# Altium PCB powerboard_4layer.PcbDoc (part 1 of 2)
Units mil, origin at the board's own origin, x right, y up, seen from the top; angles counter-clockwise.
Board outline 3779.53 x 2125.98 mil, 4 copper layers (Top Layer, Mid-Layer 1, Mid-Layer 2, Bottom Layer); 154 components, 94 nets, 450 pads, 392 vias.
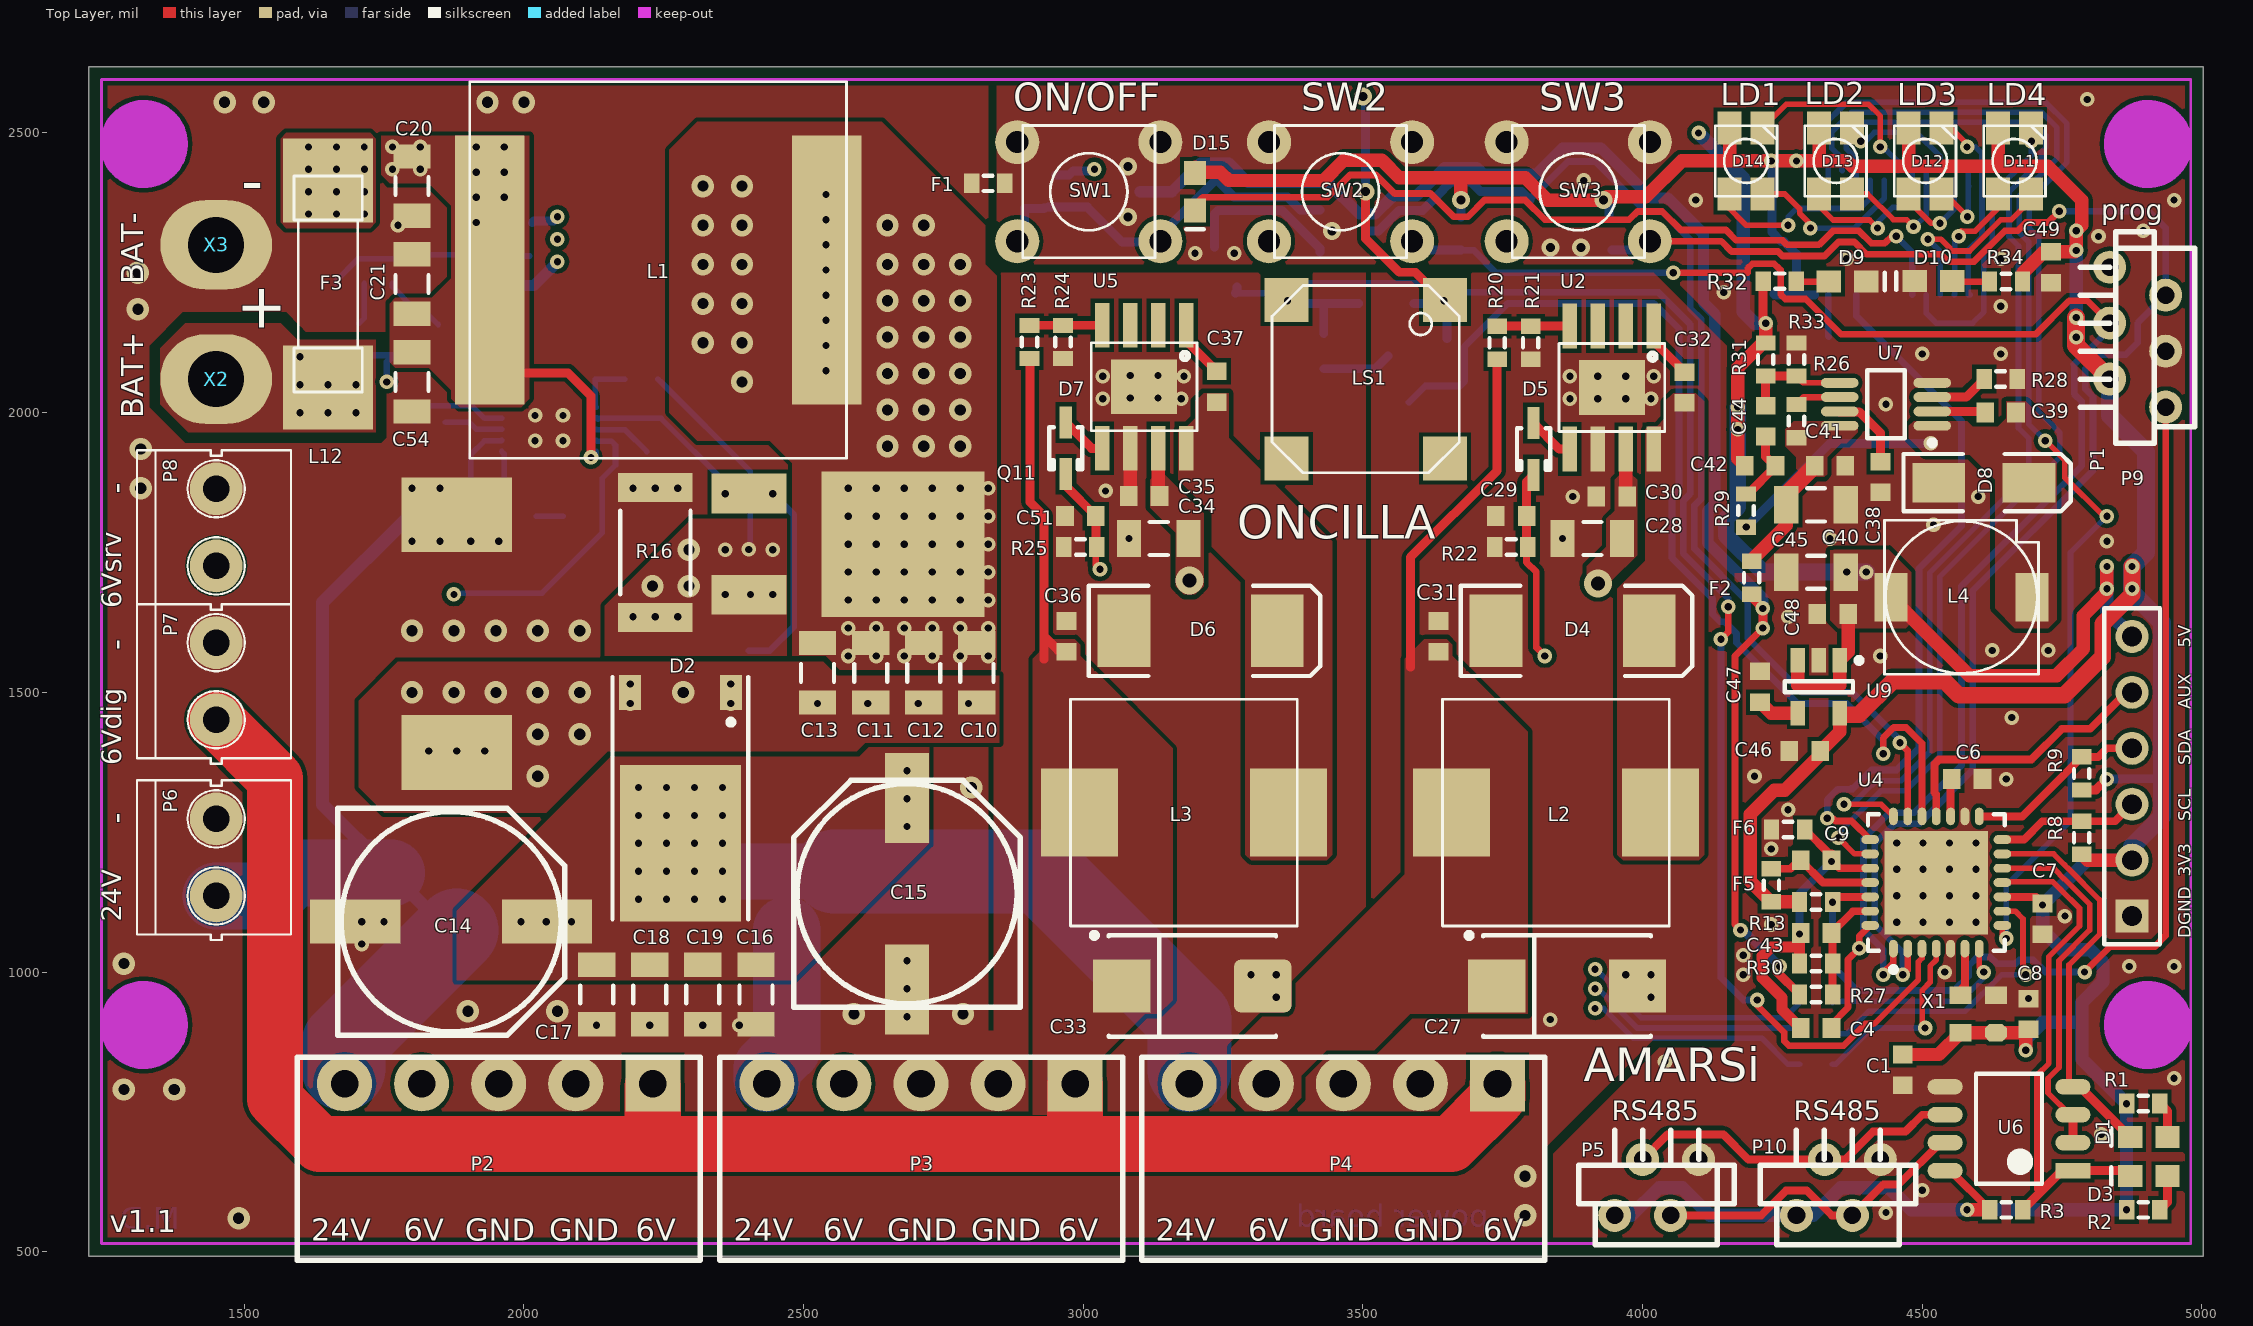
[diagram p0: Top Layer view]
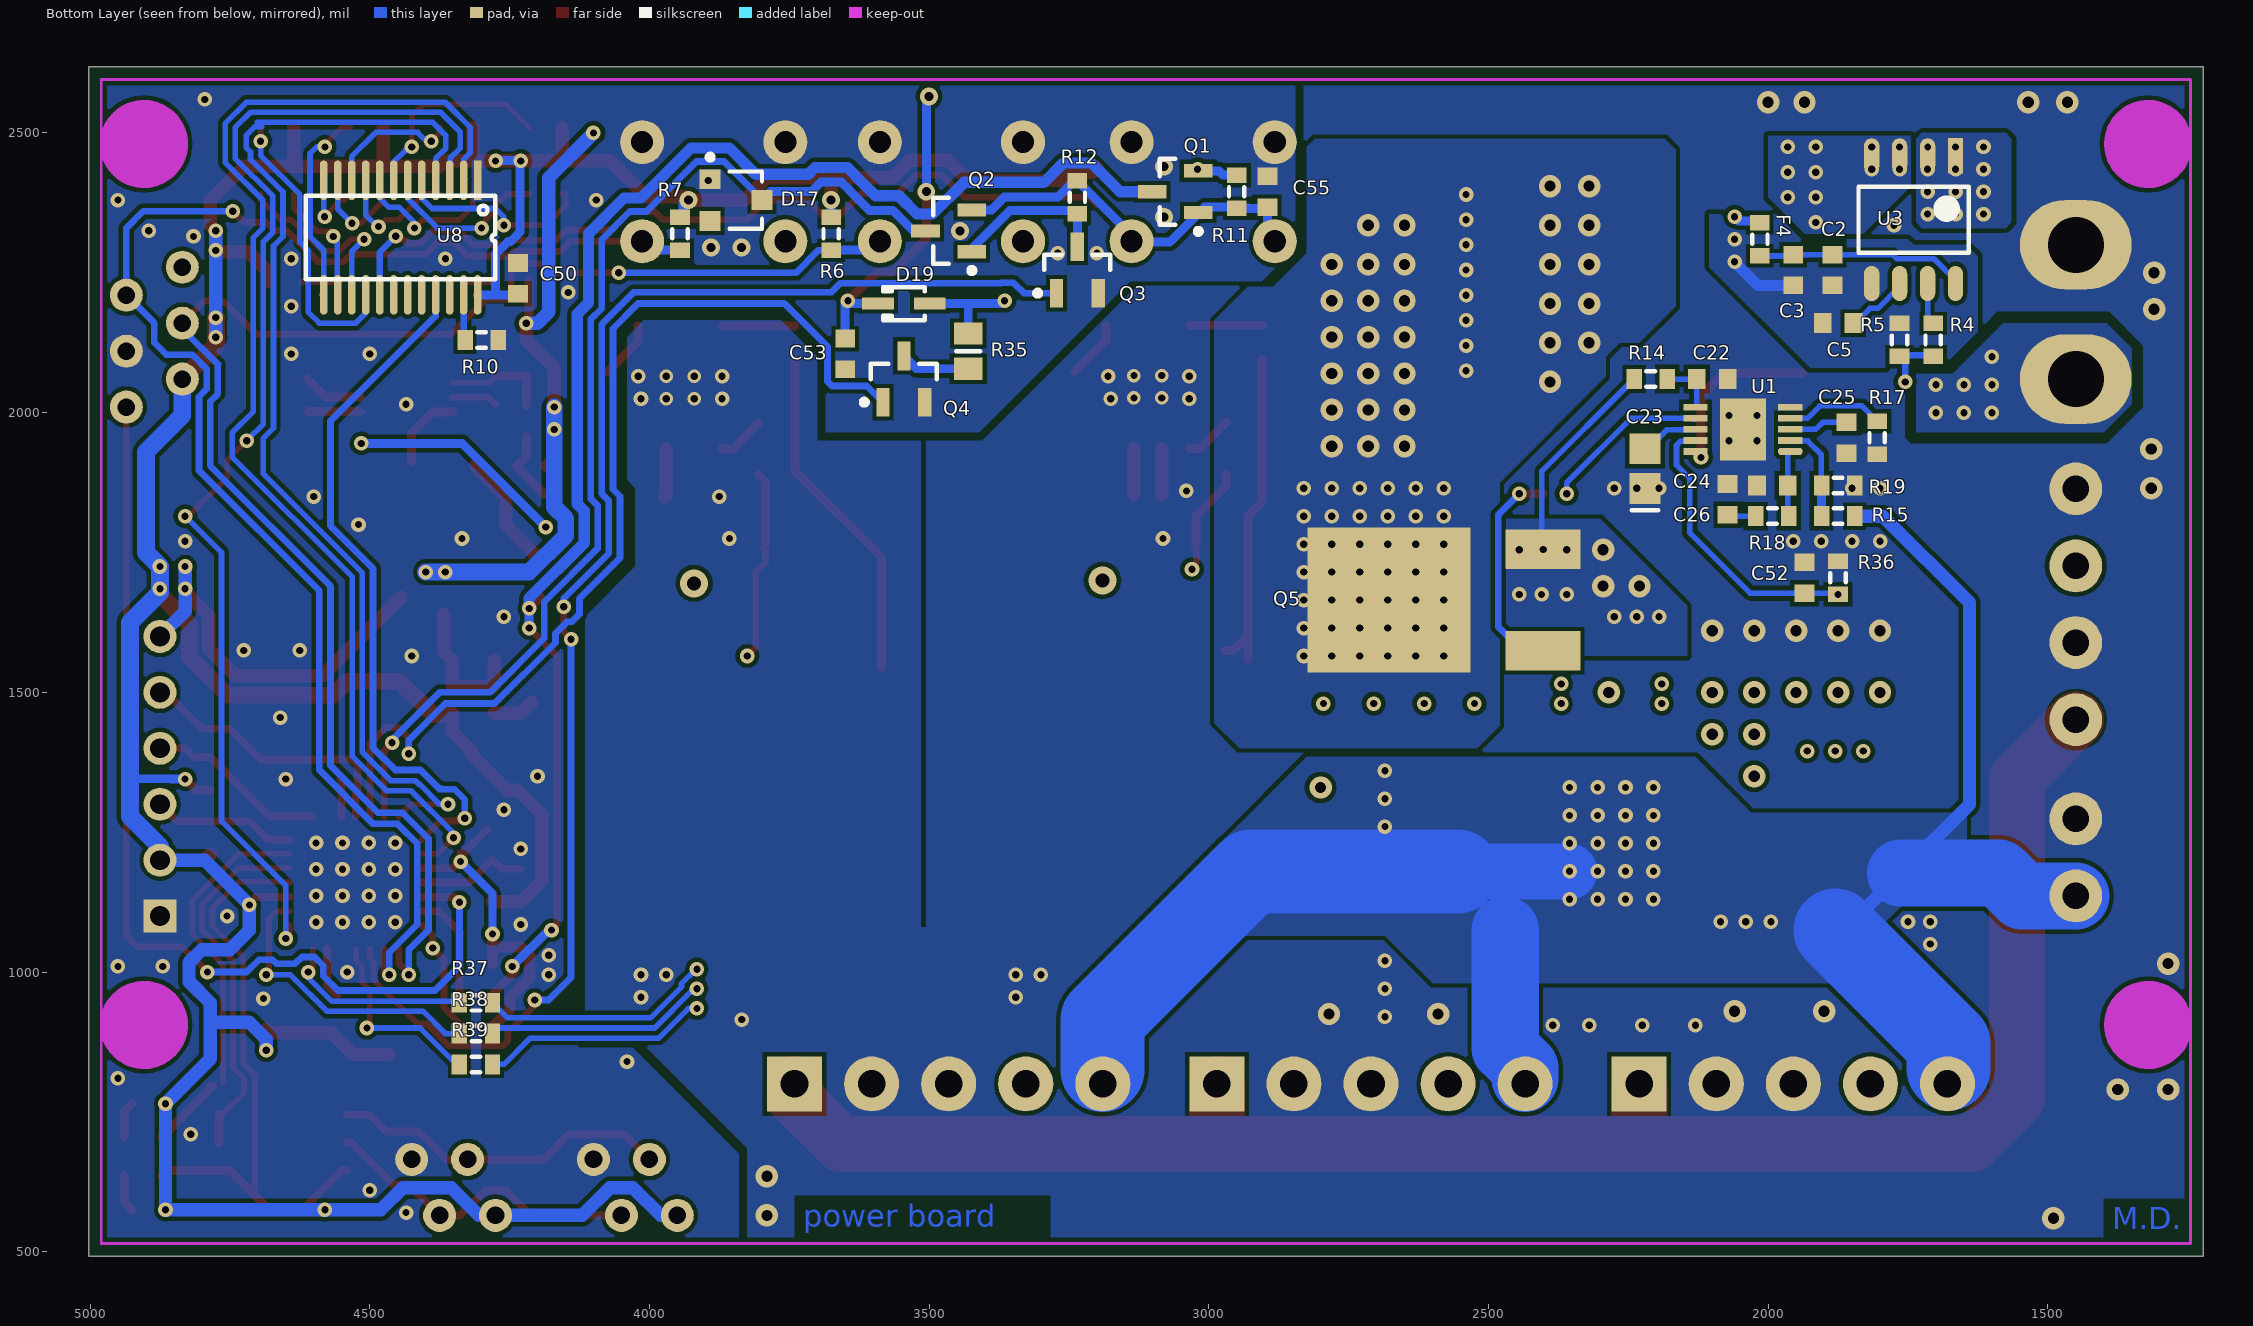
[diagram p1: Bottom Layer view, seen from below]
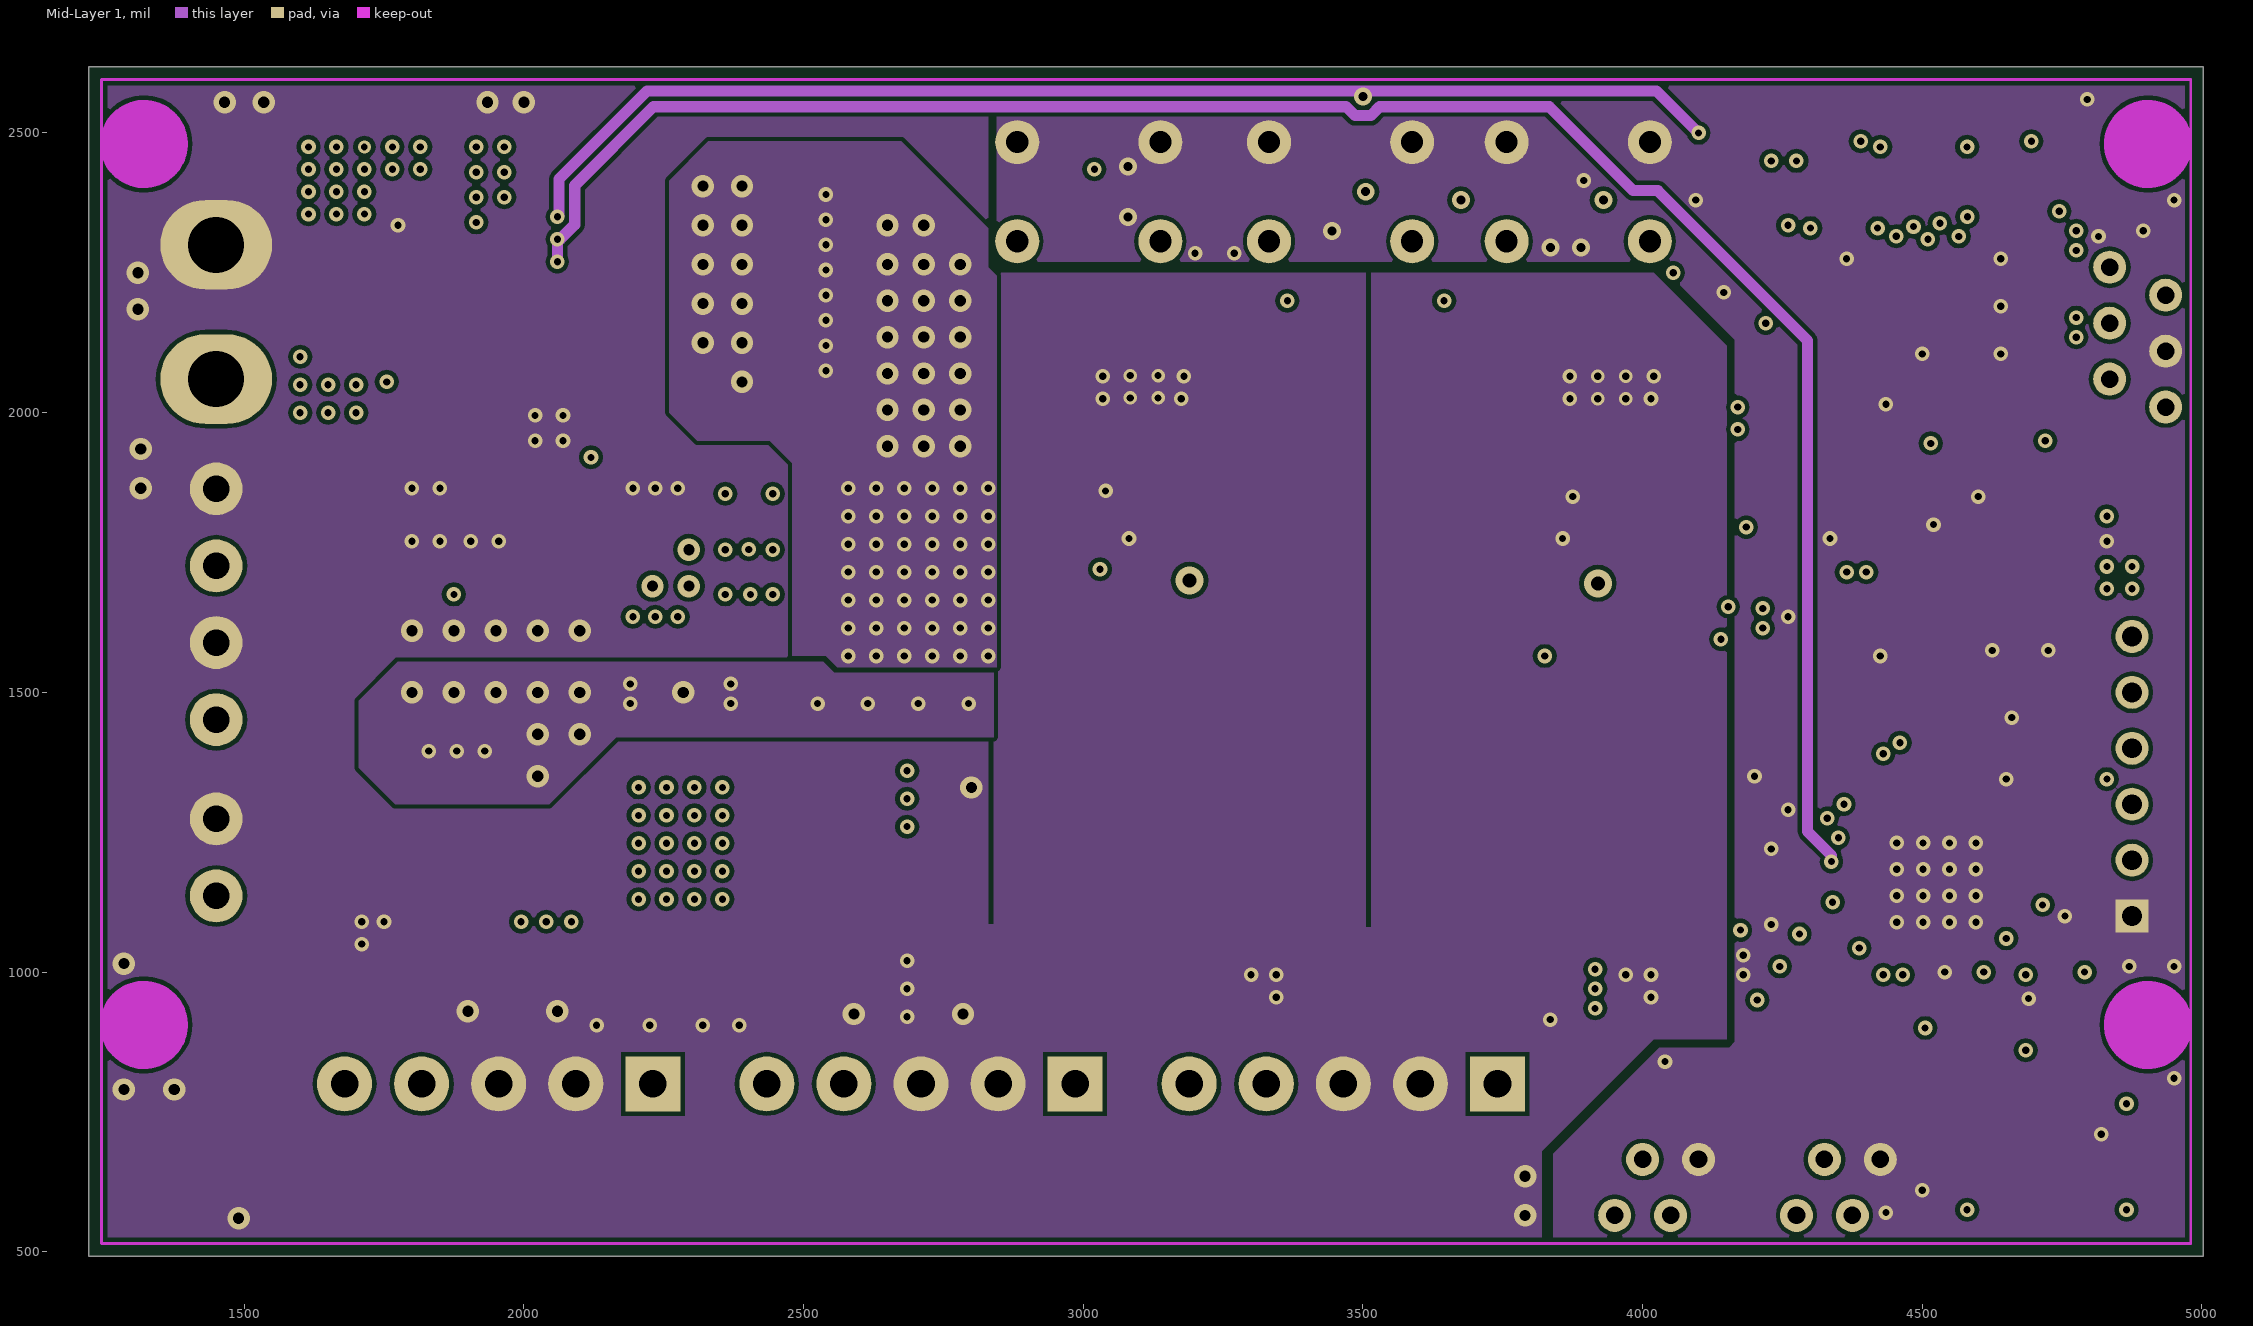
[diagram p2: Mid-Layer 1]
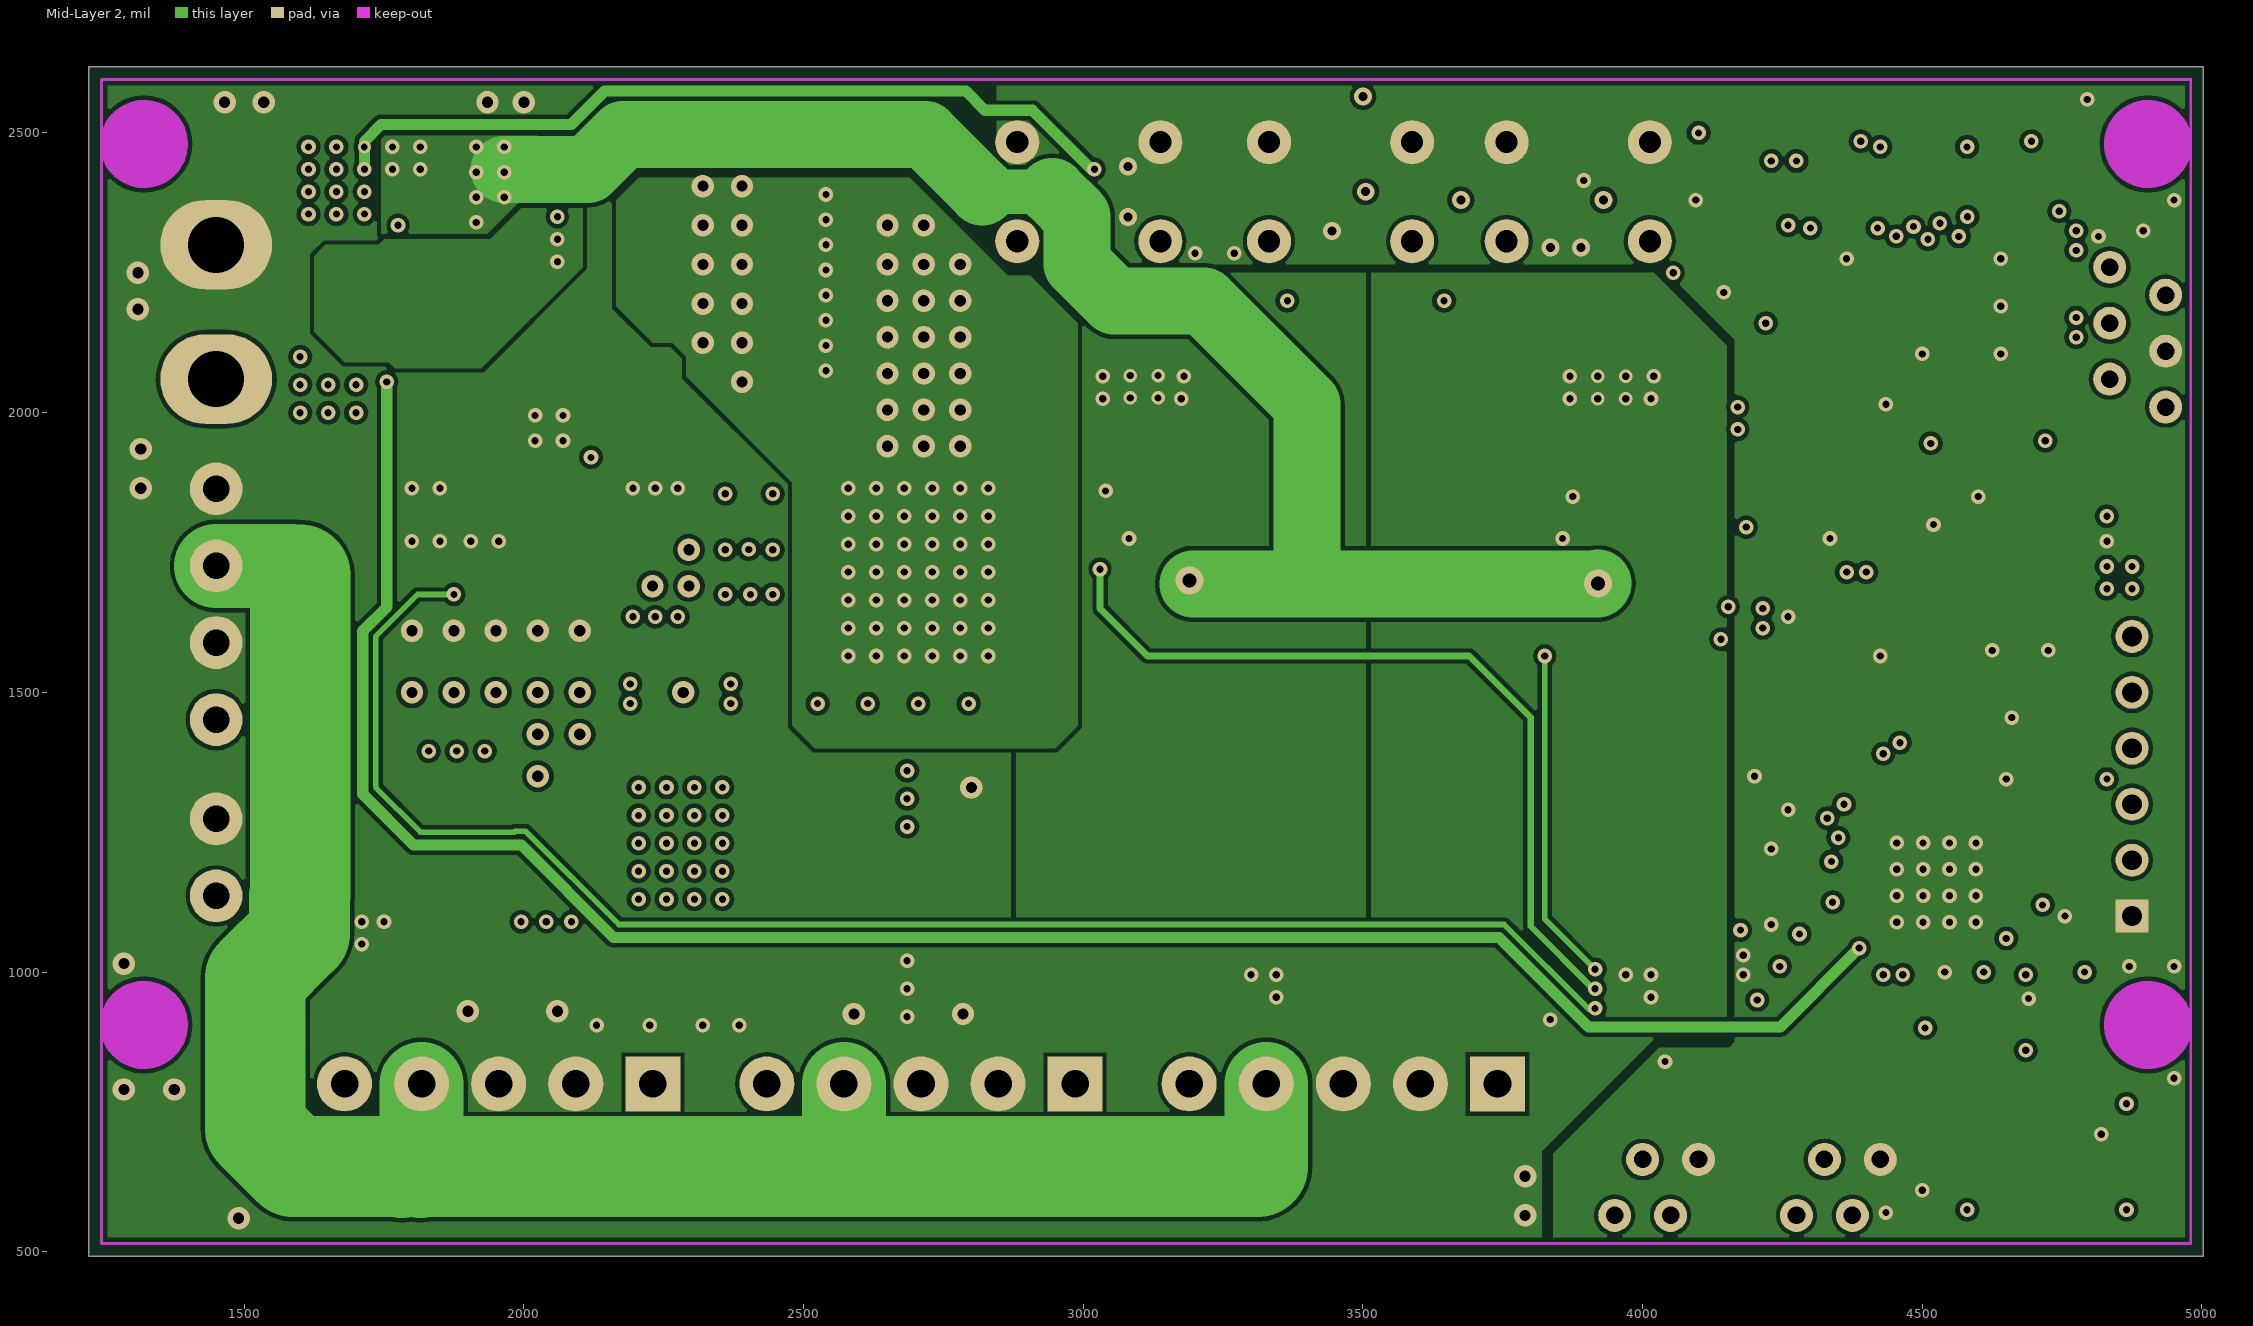
[diagram p3: Mid-Layer 2]

## Layer stack, top to bottom
Top Layer: signal copper 1.4
Dielectric: prepreg 12.6, FR-4, Dk 4.8
Mid-Layer 1: signal copper 1.4
Dielectric: core 12.6, FR-4, Dk 4.8
Mid-Layer 2: signal copper 1.4
Dielectric: prepreg 12.6, FR-4, Dk 4.8
Bottom Layer: signal copper 1.4

## Board outline
1222.44,2618.11 1222.44,492.13 5001.97,492.13 5001.97,2618.11

## Design rules (kind name [scope] priority, off if disabled: settings)
Clearance Clearance_1 [(InPadClass('All Pads'))] p1: gap=7.5
Clearance [All] p2: gap=8
FabricationTestPointUsage TestPointUsage [All] p1: valid=0 allowmultiple=FALSE
FabricationTestpoint Testpoint [All] p1: side=3 testpointundercomponent=TRUE minsize=40 maxsize=100 preferedsize=60 minholesize=0 maxholesize=40 preferedholesize=32 testpointgrid=1 allowsidetop=TRUE allowsidebottom=TRUE usegrid=TRUE gridtolerance=0.01
HoleSize [All] p1: absolutevalues=TRUE maxlimit=100 minlimit=10 maxpercent=80.000 minpercent=20.000
MinimumSolderMaskSliver [All] p1: minsoldermaskwidth=3.94
PolygonConnect [All] p1: connectstyle=Direct reliefconductorwidth=10 reliefentries=4 polygonreliefangle="90 Angle"
RoutingVias [All] p1: holewidth=16 width=32 viastyle="Through Hole" minholewidth=12 minwidth=24 maxholewidth=50 maxwidth=100
SilkscreenOverComponentPads [All] p1: minsilkscreentomaskgap=10
SolderMaskExpansion [All] p1: expansion=1.97
Width [All] p1: maxlimit=200 minlimit=7.87 preferedwidth=10 toplayer_minwidth=8 midlayer1_prefwidth=7.87 midlayer2_prefwidth=7.87 bottomlayer_minwidth=8 minimp=50.000000 maximp=50.000000 favimp=50.000000
23 further rules are at their usual default settings.

## Classes and differential pairs
component class Leds: C49 C50 D11 D12 D13 D14 D15 R10 U8
component class Power_onboard: C38 C39 C40 C41 C42 C43 C44 C45 C46 C47 C48 C55 D8 D9 D10 D17 F1 F2 L4 Q1 Q2 Q3 R11 R12 R26 R27 R28 R29 R30 R31 R32 R33 R34 SW1 U7 U9
component class Power_24V: C10 C11 C12 C13 C14 C15 C16 C17 C18 C19 C20 C21 C22 C23 C24 C25 C26 C52 C54 D2 L1 L12 Q5 Q11 R14 R15 R16 R17 R18 R19 R36 R39 U1
component class Power_6V: C27 C28 C29 C30 C31 C32 C33 C34 C35 C36 C37 C51 D4 D5 D6 D7 L2 L3 R20 R21 R22 R23 R24 R25 R37 R38 U2 U5
component class dsPIC: C1 C6 C7 C8 C9 C53 D1 D3 D19 F5 F6 LS1 P1 Q4 R1 R2 R3 R6 R7 R13 R35 SW2 SW3 U4 U6 X1
component class CurrentSensor: C2 C3 C4 C5 F4 R4 R5 U3
component class Connectors: F3 P1 P3 P4 P5 P6 P7 P8 P9 P10 R8 R9 X2 X3

## Components (designator, comment, footprint, x,y, rotation, side; value= is the part's Value field where it differs from the comment)
C1 "100nF" CAPC1608L 4465,825 r270 top
C2 "10uF, 6.3V" CAPC1608L 1885,2255 r270 bottom
C3 "100nF" CAPC1608L 1955,2255 r270 bottom
C4 "1uF, 25V" CAPC1608L 4310,900 r0 top
C5 "1nF" CAPC1608L 1875,2160 r180 bottom
C6 "10uF, 6.3V" CAPC1608L 4580,1345 r180 top
C7 "100nF" CAPC1608L 4715,1095 r90 top
C8 "100nF" CAPC1608L 4690,925 r270 top
C9 "1uF, 25V" CAPC1608L 4310,1200 r180 top
C10 "10uF, 50V" CAPC3216L 2810,1535 r90 top
C11 "10uF, 50V" CAPC3216L 2620,1535 r90 top
C12 "10uF, 50V" CAPC3216L 2715,1535 r90 top
C13 "10uF, 50V" CAPC3216L 2525,1535 r90 top
C14 "100uF, 35V, 29mR" CAP_POL_SMD_SIZE_G 1870,1090 r90 top
C15 "100uF, 35V, 29mR" CAP_POL_SMD_SIZE_G 2685,1140 r180 top
C16 "10uF, 50V" CAPC3216L 2415,960 r90 top
C17 "10uF, 50V" CAPC3216L 2130,960 r90 top
C18 "10uF, 50V" CAPC3216L 2225,960 r90 top
C19 "10uF, 50V" CAPC3216L 2320,960 r90 top
C20 "10uF, 50V" CAPC3216L 1800,2405 r90 top
C21 "10uF, 50V" CAPC3216L 1800,2230 r270 top
C22 "2.2nF" CAPC1608L 2100,2060 r0 bottom
C23 "10uF, 16V" CAPC2512L 2220,1900 r90 bottom
C24 "100pF" CAPC1608L 1992.44,1870 r180 bottom
C25 "1uF, 25V" CAPC1608L 1860,1955 r90 bottom
C26 "6.8nF" CAPC1608L 2072.44,1845 r270 bottom
C27 "330uF, 10V" 7343#1 3865,975 r0 top
C28 "10uF, 50V" CAPC3216L 3910,1775 r0 top
C29 "1uF, 25V" CAPC1608L 3765,1815 r0 top
C30 "100nF" CAPC1608L 3945,1850 r0 top
C31 "100nF" CAPC1608L 3635,1600 r270 top
C32 "10nF" CAPC1608L 4075,2045 r270 top
C33 "330uF, 10V" 7343#2 3195,975 r0 top
C34 "10uF, 50V" CAPC3216L 3135,1775 r0 top
C35 "100nF" CAPC1608L 3108.83,1851.29 r0 top
C36 "100nF" CAPC1608L 2970,1600 r270 top
C37 "10nF" CAPC1608L 3238.83,2046.29 r270 top
C38 "100nF" CAPC1608L 4425,1885 r90 top
C39 "10nF" CAPC1608L 4640,2000 r180 top
C40 "10uF, 50V" CAPC3216L 4310,1835 r180 top
C41 "100nF" CAPC1608L 4335,1905 r180 top
C42 "3.3nF" CAPC1608L 4210,1905 r180 top
C43 "100nF" CAPC1608L 4310,1070 r0 top
C44 "22nF" CAPC1608L 4220,1985 r270 top
C45 "22uF, 10V" CAPC3216L 4310,1715 r0 top
C46 "10uF, 6.3V" CAPC1608L 4290,1395 r0 top
C47 "10nF" CAPC1608L 4210,1510 r270 top
C48 "1uF, 25V" CAPC1608L 4340,1640 r0 top
C49 "1uF, 25V" CAPC1608L 4730,2260 r90 top
C50 "100nF" CAPC1608L 4235,2240 r270 bottom
C51 "1uF, 25V" CAPC1608L 2995,1815 r0 top
C52 "1uF, 25V" CAPC1608L 1935,1705 r270 bottom
C53 "1uF, 25V" CAPC1608L 3650,2105 r270 bottom
C54 "10uF, 50V" CAPC3216L 1800,2055 r90 top
C55 "100n" CAPC1608L 2895,2395 r270 bottom
D1 "LED Yellow" CD1608-0603 4905,705 r180 top
D2 "VS-20WT04FN" TO-252AA 2280,1365 r180 top
D3 "LED Red" CD1608-0603 4905,635 r180 top
D4 "SSC53L" SMC 3875,1610 r0 top
D5 "1PS76SB10" SOD323 3805,1935 r270 top
D6 "SSC53L" SMC 3210,1610 r0 top
D7 "1PS76SB10" SOD323 2968.83,1936.29 r270 top
D8 "MURA110T3" SMA 4610,1875 r0 top
D9 "LED Green" CD1608-0603 4366.14,2234.25 r0 top
D10 "LED Green" CD1608-0603 4520,2235 r180 top
D11 "CLV1A-FKB-CJ1M1F1BB7R4S3" RGB_LED_PLCC4 4665,2450 r180 top
D12 "CLV1A-FKB-CJ1M1F1BB7R4S3" RGB_LED_PLCC4 4505,2450 r180 top
D13 "CLV1A-FKB-CJ1M1F1BB7R4S3" RGB_LED_PLCC4 4345,2450 r180 top
D14 "CLV1A-FKB-CJ1M1F1BB7R4S3" RGB_LED_PLCC4 4185,2450 r180 top
D15 "LED Green" CD1608-0603 3200,2395 r270 top
D17 "BZX84C3V3LT1" 318-07 3845,2380 r270 bottom
D19 "1PS76SB10" SOD323 3545,2195 r0 bottom
F1 "Ferrit 0.35R 500mA" RESC1608L 2830,2410 r0 top
F2 "Ferrit 0.35R 500mA" RESC1608L 4195,1705 r90 top
F3 "SMM 25A" "FUSE SMM" 1650,2230 r90 top
F4 "Ferrit 1.5R 50mA" RESC1608L 2015,2310 r90 bottom
F5 "Ferrit 0.35R 500mA" RESC1608L 4230,1155 r90 top
F6 "Ferrit 0.35R 500mA" RESC1608L 4260,1255 r0 top
L1 "IHLP6767GZER3R3M01" IHLP-6767GZ 2240,2255 r0 top
L2 "IHLP4040DZER150M11" IHLP-4040DZ 3845,1285 r180 top
L3 "IHLP4040DZER150M11" IHLP-4040DZ 3180,1285 r180 top
L4 "SLF7045T-101MR60-H" SLF7045T 4570,1670 r180 top
L12 "IHLP5050FDER3R3M01" IHLP5050 1880,1605 r270 top
LS1 "ST-03CH" PIEZO_8.5X8.5MM 3505,2060 r270 top
P1 "6WAY_TERMINAL" MICROMATCH_6WAY_SE 4885,2160 r90 top
P2 "5WAY_JST_POWER" TERMINAL_5WAY_35 1955,800 r180 top
P3 "5WAY_JST_POWER" TERMINAL_5WAY_35 2710,800 r180 top
P4 "5WAY_JST_POWER" TERMINAL_5WAY_35 3465,800 r180 top
P5 "4WAY_TERMINAL" MICROMATCH_4WAY_SE 4050,615 r0 top
P6 "2WAY_TERMINAL" TYCO_2WAY_35MM 1450,1205 r270 top
P7 "2WAY_TERMINAL" TYCO_2WAY_35MM 1450,1520 r270 top
P8 "2WAY_TERMINAL" TYCO_2WAY_35MM 1450,1795 r270 top
P9 "Header 6" HDR1X6 4875,1100 r90 top
P10 "4WAY_TERMINAL" MICROMATCH_4WAY_SE 4375,615 r0 top
Q1 "SQ2319ES-T1-GE3" SOT23_N 3060,2395 r0 bottom
Q2 "SQ2319ES-T1-GE3" SOT23_N 3465,2325 r0 bottom
Q3 "2N7002" SOT23_N 3235,2255 r90 bottom
Q4 "2N7002" SOT23_N 3545,2060 r90 bottom
Q5 "FDD10AN06A0" "TO-252A DPak" 2540,1665 r0 bottom
Q11 "FDD10AN06A0" "TO-252A DPak" 2540,1765 r0 top
R1 "1k" RESC1608L 4895,765 r0 top
R2 "1k" RESC1608L 4895,575 r0 top
R3 "10k" RESC1608L 4650,575 r180 top
R4 "2.7k" RESC1608L 1705,2130 r90 bottom
R5 "10k" RESC1608L 1765,2130 r270 bottom
R6 "10k" RESC1608L 3675,2320 r90 bottom
R7 "10k" RESC1608L 3945,2320 r90 bottom
R8 "4.7k" RESC1608L 4785,1240 r270 top
R9 "4.7k" RESC1608L 4785,1355 r270 top
R10 "1.5k" RESC1608L 4300,2130 r0 bottom
R11 "100k" RESC1608L 2950,2395 r90 bottom
R12 "100k" RESC1608L 3235,2385 r90 bottom
R13 "10k" RESC1608L 4310,1125 r180 top
R14 "22R" RESC1608L 2210,2060 r0 bottom
R15 "200K, 1%" RESC1608L 1875,1815 r180 bottom
R16 "1.5mR, 2W" RESC6332N 2235,1750 r270 top
R17 "24.3K" RESC1608L 1805,1955 r90 bottom
R18 "10K" RESC1608L 1992.44,1815 r180 bottom
R19 "14.3K, 1%" RESC1608L 1875,1870 r0 bottom
R20 "10k, 1%" RESC1608L 3740,2125 r270 top
R21 "2.55k, 1%" RESC1608L 3800,2125 r90 top
R22 "10k" RESC1608L 3765,1760 r0 top
R23 "10k, 1%" RESC1608L 2903.83,2126.29 r270 top
R24 "2.55k, 1%" RESC1608L 2963.83,2126.29 r90 top
R25 "10k" RESC1608L 2995,1760 r0 top
R26 "115k" RESC1608L 4275,1985 r270 top
R27 "100k, 1%" RESC1608L 4310,960 r180 top
R28 "200k" RESC1608L 4640,2060 r180 top
R29 "138k" RESC1608L 4185,1825 r270 top
R30 "15k, 1%" RESC1608L 4310,1015 r0 top
R31 "10k, 1%" RESC1608L 4220,2095 r90 top
R32 "2k2" RESC1608L 4245,2235 r180 top
R33 "10k, 1%" RESC1608L 4275,2095 r270 top
R34 "470R" RESC1608L 4649.61,2234.25 r0 top
R35 "100R" RESC2012L 3430,2110 r270 bottom
R36 "10K" RESC1608L 1875,1705 r270 bottom
R37 "2.2k" RESC1608L 4310,945 r0 bottom
R38 "2.2k" RESC1608L 4310,890 r0 bottom
R39 "2.2k" RESC1608L 4310,835 r0 bottom
SW1 "SWITCH_TACTILE" TACTILE_SWITCH 3010,2395 r270 top
SW2 "SWITCH_TACTILE" TACTILE_SWITCH 3460,2395 r90 top
SW3 "SWITCH_TACTILE" TACTILE_SWITCH 3885,2395 r90 top
U1 "LT3757" MSOP-10-TP 2045,1970 r0 bottom
U2 "TPS5450" "SOIC8 POWERPAD" 3945,2045 r270 top
U3 "ACS714ELCTR-30A-T" SOIC-8_M 1740,2345 r270 bottom
U4 "DSPIC33FJ128GP802-I/MM" QFNS-MM28_N 4525,1160 r90 top
U5 "TPS5450" "SOIC8 POWERPAD" 3108.83,2046.29 r270 top
U6 "ADM3078E" SOIC-8_M 4655,720 r180 top
U7 "LM25007MM" MUA08A_N 4435,2015 r180 top
U8 "TLC59025" SOP24 4444.88,2312.99 r270 bottom
U9 "LP2992AIM5-3.3" MF05A_N 4315,1510 r270 top
X1 "ASDM1-8.000MHZ-LC-T" Crystal-Oscillator-2520 4600,925 r90 top
X2 "VBAT" "TESTPIN 2MM" 1450,2060 r0 top
X3 "GND" "TESTPIN 2MM" 1450,2300 r0 top

## Footprints (in the part's own frame and the unit in brackets; to place one, negate y for a bottom-side part, rotate by r counter-clockwise, add the part's x,y. Pads: shape width x height; smd on the part's side, far side on the other; paste and mask are expansions set on the pad)
318-07 [mm] "SOT-23; 3 Leads; Body 3.0 x 2.5 mm, inc. leads (LxW max)"
  rect 0.9x0.95 smd: 1(-0.95,-1.175) 2(0.95,-1.175) 3(0,1.175)
  silkscreen extent -2.07,-1.3 1.3,1.18
7343#1 [mm] "Capacitor, SM Tantalum; Body 7.3 x 4.3 mm (LxW typ)"
  rect 2.6x2.4 smd: 1(-3.2,0) 2(3.2,0)
  silkscreen extent -4.57,-2.3 3.8,2.42
7343#2 [mm] "Capacitor, SM Tantalum; Body 7.3 x 4.3 mm (LxW typ)"
  rect 2.6x2.4 smd: 1(-3.2,0)
  rrect25% 2.6x2.4 smd: 2(3.2,0)
  silkscreen extent -4.57,-2.3 3.8,2.42
CAP_POL_SMD_SIZE_G [mm] "polarized capacitor surface mount size G"
  rect 2x4.1 smd: 1(0,4.35) 2(0,-4.35)
  silkscreen extent -5.15,-5.15 5.15,5.15, body extent -5.15,-5.15 5.15,5.15, height 10.2
CAPC1608L [mm] "Chip Capacitor, Body 1.6x0.8mm, IPC High Density"
  rect 0.8x0.9 smd: 1(-0.7,0) 2(0.7,0)
  body extent -0.87,-0.48 0.87,0.48, height 1.3
CAPC2512L [mm] "Chip Capacitor, Body 2.54x1.27mm, IPC High Density"
  rect 1.4x1.4 smd: 1(-0.9,0) 2(0.9,0)
  silkscreen extent -1.9,-0.6 -1.9,0.6, body extent -1.45,-0.82 1.45,0.82, height 1.3
CAPC3216L [mm] "Chip Capacitor, Body 3.2x1.6mm, IPC High Density"
  rect 1.1x1.7 smd: 1(-1.35,0) 2(1.35,0)
  silkscreen extent -0.4,-0.75 0.4,0.75, body extent -1.7,-0.9 1.7,0.9, height 1.3
CD1608-0603 [mm] "Chip Diode; Body 1.6 x 0.8 mm (LxW typ)"
  rect 1.1x1 smd: 1(-0.85,0) 2(0.85,0)
  silkscreen extent 1.7,-0.4 1.7,0.4
Crystal-Oscillator-2520 [mm] "Crystal Package, Body 2.5x2.0mm, Pitch 1.65mm, IPC Low Density"
  oct 0.8x1 smd: 1(-0.85,-0.8)
  rect 0.8x1 smd: 2(0.85,-0.8) 3(0.85,0.8) 4(-0.85,0.8)
  body extent -1.25,-1 1.25,1, height 0.8
"FUSE SMM" [mm]
  rect 3.8x4.1 smd: 1(-4.7,0) 2(4.7,0)
  silkscreen extent -4.9,-1.55 4.9,1.55, body extent -4.9,-1.55 4.9,1.55, height 3.1
HDR1X6 [mm] "Connector; Header; 6 Position"
  rect 1.5x1.5 hole 0.9: 1(0,0)
  round 1.5 hole 0.9: 2(2.54,0) 3(5.08,0) 4(7.62,0) 5(10.16,0) 6(12.7,0)
  silkscreen extent -1.27,-1.27 13.97,1.27
IHLP5050 [mm] "Inductor from Vishay/Dale, Body 13.2x12.9mm, IPC Low Density"
  rect 3.4x5 smd: 1(-5.4,0) 2(5.4,0)
  body extent -6.8,-6.45 6.8,6.45, height 6.9
IHLP-4040DZ [mm] "Low Profile, High Current IHLP® Inductors"
  rect 3.5x4 smd: 1(-4.75,0) 2(4.75,0)
  silkscreen extent -5.15,-5.15 5.15,5.15, body extent -5.15,-5.15 5.15,5.15, height 4
IHLP-6767GZ [mm] "Low Profile, High Current IHLP® Inductors"
  rect 3.15x12.2 smd: 1(-7.65,0) 2(7.65,0)
  silkscreen extent -8.55,-8.55 8.55,8.55, body extent -8.55,-8.55 8.55,8.55, height 7
MF05A_N [mm] "SOT23, 5-Leads, Body 2.9x1.6mm, Pitch 0.95mm, Lead Span 2.8mm, IPC Medium Density"
  rect 1.1x0.65 smd: 1(-1.2,0.95) 2(-1.2,0) 3(-1.2,-0.95) 4(1.2,-0.95) 5(1.2,0.95)
  silkscreen extent -1.32,-1.55 0.25,1.95, body extent -0.9,-1.55 0.9,1.55, height 1.19
MICROMATCH_4WAY_SE [mm] "tyco micromatch connector 4 way side entry"
  round 1.5 hole 0.8: 1(-2.54,-1.27) 2(-1.27,1.27) 3(0,-1.27) 4(1.27,1.27)
  silkscreen extent -4.18,-2.6 2.88,2.6, body extent -4.18,-2.6 2.88,1, height 5.8
MICROMATCH_6WAY_SE [mm] "tyco micromatch connector 6 way side entry"
  round 1.5 hole 0.8: 1(-3.81,-1.27) 2(-2.54,1.27) 3(-1.27,-1.27) 4(0,1.27) 5(1.27,-1.27) 6(2.54,1.27)
  silkscreen extent -5.45,-2.6 4.15,2.6, body extent -5.45,-2.6 4.15,1, height 5.8
MSOP-10-TP [mm] "MSOP, 10-Leads+thermal pad, Body 3x4.9mm, Pitch 0.5mm, IPC Medium Density"
  oct 1.1x0.3 smd: 1(-2.15,1)
  rect 1.1x0.3 smd: 2(-2.15,0.5) 3(-2.15,0) 4(-2.15,-0.5) 5(-2.15,-1) 6(2.15,-1) 7(2.15,-0.5) 8(2.15,0) 9(2.15,0.5) 10(2.15,1)
  rect 2.1x2.8 smd: 11(0,0)
  body extent -1.5,-1.5 1.5,1.5, height 1.1
MUA08A_N [mm] "TSOP, 8-Leads, Body 3x3mm, Pitch 0.65mm, IPC Medium Density"
  oval 1.7x0.45 smd: 1(-2.1,0.975) 2(-2.1,0.325) 3(-2.1,-0.325) 4(-2.1,-0.975) 5(2.1,-0.975) 6(2.1,-0.325) 7(2.1,0.325) 8(2.1,0.975)
  silkscreen extent -2.22,-1.55 0.85,1.87, body extent -1.6,-1.6 1.6,1.6, height 1.09
PIEZO_8.5X8.5MM [mm]
  rect 2x2 smd: 1(-3.6,3.6) 2(-3.6,-3.6) 3(3.6,-3.6) 4(3.6,3.6)
  silkscreen extent -4.25,-4.25 4.25,4.25, body extent -4.25,-4.25 4.25,4.25, height 3.5
QFNS-MM28_N [mm] "QFN, 28-Leads, Body 6x6 mm, Pitch 0.65mm, IPC Medium Density"
  oval 0.8x0.4 smd: 1(-3,1.95) 2(-3,1.3) 3(-3,0.65) 4(-3,0) 5(-3,-0.65) 6(-3,-1.3) 7(-3,-1.95) 15(3,-1.95) 16(3,-1.3) 17(3,-0.65) 18(3,0) 19(3,0.65) 20(3,1.3) 21(3,1.95)
  oval 0.4x0.8 smd: 8(-1.95,-3) 9(-1.3,-3) 10(-0.65,-3) 11(0,-3) 12(0.65,-3) 13(1.3,-3) 14(1.95,-3) 22(1.95,3) 23(1.3,3) 24(0.65,3) 25(0,3) 26(-0.65,3) 27(-1.3,3) 28(-1.95,3)
  rect 4.7x4.7 smd: 29(0,0)
  silkscreen extent -4.07,-3.1 3.1,3.1, body extent -3.08,-3.08 3.08,3.08, height 1
RESC1608L [mm] "Chip Resistor, Body 1.6x0.8mm, IPC High Density"
  rect 0.7x0.9 smd: 1(-0.75,0) 2(0.75,0)
  silkscreen extent -0.2,-0.35 0.2,0.35, body extent -0.85,-0.48 0.85,0.48, height 0.9
RESC2012L [mm] "Chip Resistor, Body 2.0x1.3mm, IPC High Density"
  rect 1x1.3 smd: 1(-0.8,0) 2(0.8,0)
  silkscreen extent 0,-0.55 0,0.55, body extent -1.07,-0.7 1.07,0.7, height 2.54
RESC6332N [mm] "Chip Resistor, Body 6.3x3.2mm, IPC Medium Density"
  rect 1.3x3.4 smd: 1(-2.95,0) 2(2.95,0)
  silkscreen extent -1.9,-1.6 1.9,1.6, body extent -3.18,-1.5 3.18,1.5, height 1.6
RGB_LED_PLCC4 [mm]
  rect 1.1x1.5 smd: 1(-0.75,-1.5) 2(0.75,-1.5) 3(0.75,1.5) 4(-0.75,1.5)
  silkscreen extent -1.4,-1.6 1.4,1.6, body extent -1.4,-1.6 1.4,1.6, height 2
SLF7045T [mm] "TDK inductor"
  rect 1.5x2.2 smd: 1(-3.2,0) 2(3.2,0)
  silkscreen extent -3.5,-3.5 3.5,3.5, body extent -3.5,-3.5 3.5,3.5, height 4.5
SMA [mm] "DO-214-AC/SMA; 2 C-Bend Leads; Body 5 x 2.7 mm, inc. leads (LxW)"
  rect 2.4x1.8 smd: 1(-2.05,0) 2(2.05,0)
  silkscreen extent -3.65,-1.3 3.95,1.3
SMC [mm] "DO-214-AB/SMC; 2 C-Bend Leads; Body 7.9 x 5.9 mm, inc. leads (LxW)"
  rect 2.4x3.3 smd: 1(-3.475,0) 2(3.475,0)
  silkscreen extent -5.07,-2.05 5.43,2.05
SOD323 [mm] "SOD-323/SC-76; 2 Leads; Body 1.7 x 1.3 mm, (LxW)"
  rect 1.45x0.55 smd: 1(1.175,0) 2(-1.175,0)
  silkscreen extent -0.95,-0.75 0.95,0.75
"SOIC8 POWERPAD" [mil]
  rect 80x26 smd: 1(-110,75) 2(-110,25) 3(-110,-25) 4(-110,-75) 5(110,-75) 6(110,-25) 7(110,25) 8(110,75)
  rect 98x118 smd: 9(0,0)
  silkscreen extent -79,-94 79,94, body extent -79,-94 79,94, height 66
SOIC-8_M [mm] "SOIC, 8-Leads, Body 4.9x3.9mm, Pitch 1.27mm, IPC Low Density"
  rect 1.6x0.7 smd: 1(-2.9,1.905)
  oval 1.6x0.7 smd: 2(-2.9,0.635) 3(-2.9,-0.635) 4(-2.9,-1.905) 5(2.9,-1.905) 6(2.9,-0.635) 7(2.9,0.635) 8(2.9,1.905)
  silkscreen extent -1.5,-2.5 1.5,2.5, body extent -2,-2.5 2,2.5, height 1.73
SOP24 [mm]
  rect 1.8x0.35 smd: 1(-2.6,3.5)
  oval 1.8x0.35 smd: 2(-2.6,2.865) 3(-2.6,2.23) 4(-2.6,1.595) 5(-2.6,0.96) 6(-2.6,0.325) 7(-2.6,-0.31) 8(-2.6,-0.945) 9(-2.6,-1.58) 10(-2.6,-2.215) 11(-2.6,-2.85) 12(-2.6,-3.485) 13(2.6,-3.485) 14(2.6,-2.85) 15(2.6,-2.215) 16(2.6,-1.58) 17(2.6,-0.945) 18(2.6,-0.31) 19(2.6,0.325) 20(2.6,0.96) 21(2.6,1.595) 22(2.6,2.23) 23(2.6,2.865) 24(2.6,3.5)
  silkscreen extent -1.9,-4.3 1.9,4.3, body extent -1.9,-4.3 1.9,4.3, height 1.75
SOT23_N [mm] "SOT23, 3-Leads, Body 2.9x1.3mm, Pitch 0.95mm, Lead Span 2.3mm, IPC Medium Density"
  rect 1.3x0.6 smd: 1(-1.05,0.95) 2(-1.05,-0.95) 3(1.05,0)
  silkscreen extent -1.17,-1.5 0.7,1.92, body extent -0.7,-1.5 0.7,1.5, height 1.1
TACTILE_SWITCH [mm] "tactile switch through hole"
  round 2 hole 1: 1(-2.25,3.25) 2(-2.25,-3.25) 3(2.25,3.25) 4(2.25,-3.25)
  silkscreen extent -3,-3 3,3, body extent -3,-3 3,3, height 5
TERMINAL_5WAY_35 [mm] "phoenix style pluggable screw socket"
  rect 2.5x2.5 hole 1.25: 1(-7,0)
  round 2.5 hole 1.25: 2(-3.5,0) 3(0,0) 4(3.5,0) 5(7,0)
  silkscreen extent -9.15,-1.2 9.15,8, body extent -9.15,-1.2 9.15,8, height 7
"TESTPIN 2MM" [mil]
  oval 200x160 hole 100: 1(0,0)
"TO-252A DPak" [mm] "3-Pin Transistor Package, Body 6.75x10.4mm, IPC Low Density"
  rect 3.4x1.8 smd: 1(-3.5,2.3) 3(-3.5,-2.3)
  rect 7.4x6.6 smd: 4(3.5,0)
  body extent -5.05,-3.3 7.2,3.3, height 2.4
TO-252AA [mm] "D-PAK/TO-252-AA; 3 Leads (1 Cropped); Body 10.4 (inc. leads) x 6.7 mm (LxW max)"
  rect 1x1.6 smd: 1(-2.285,-3.425) 3(2.285,-3.425)
  rect 5.5x7.1 smd: 4(0,3.425)
  silkscreen extent -3.09,-4.13 3.09,6.88
TYCO_2WAY_35MM [mm]
  round 2.4 hole 1.2: 1(-1.75,0) 2(1.75,0)
  silkscreen extent -3.5,-3.6 3.75,3.4

## Part data
C1 C2 C3 C4 C5 C6 C7 C8 C9 C10 C11 C12 C13 C16 C17 C18 C19 C20 C21 C22 C23 C28 C29 C30 C31 C32 C34 C35 C36 C37 C38 C39 C40 C41 C42 C43 C44 C45 C46 C47 C48 C49 C50 C51 C52 C53 C54 C55: library part "Cap Semi", "Capacitor (Semiconductor SIM Model)"
C14 C15: library part CAP_POL
C24 C25 C26: library part Cap, "Capacitor"
C27 C33: library part 255D157X06R3D2T045
D1 D3 D9 D10 D15: library part LED, "LED"
D2: library part 12CWQ06FN, "Schottky Rectifier"
D4 D6: library part 30BQ040, "Schottky Rectifier"
D5 D7 D19: "Schottky Barrier Diode"
D8: library part 10MQ060N, "Schottky Rectifier"
D11 D12 D13 D14: library part RGB_LED_COMMON_ANODE
D17: "Zener Voltage Regulator Diode"
F1 F2 F4 F5 F6: library part "Fuse 1", "Ferrit Bead"
F3: library part fuse
L1 L2 L3 L4: library part Inductor
L12: library part Inductor, "Inductor"
LS1: library part piezo_sounder
P9: "Header, 6-Pin"
Q1 Q2: library part BSS84, "P-channel Enhancement Mode Vertical D-MOSFET"
Q3 Q4: library part BST82, "N-channel Enhancement Mode Field-effect Transistor"
Q5 Q11: library part nFET, "N-Channel MOSFET"
R1 R2 R3 R4 R5 R6 R7 R8 R9 R10 R11 R12 R13 R14 R15 R17 R18 R19 R20 R21 R22 R23 R24 R25 R26 R27 R28 R29 R30 R31 R32 R33 R34 R35 R36 R37 R38 R39: library part "Res Semi", "Semiconductor Resistor"
R16: library part Res2, "Resistor"
U1: "2.9-40V SEPIC, Flyback, Boost and Inverting Converter with external switch"
U3: library part ACS714, "Hall Effect-Based Linear Current Sensor"
U4: library part DSPIC33FJ128GP802T-I/MM, "High-Performance 16-bit Digital Signal Controller, 128 KB Flash, 16 KB RAM, 28-Pin QFN, Industrial Temperature, Tape and Reel"
U6: "Half-Duplex RS485 Transciever, 3.3V, 16Mbps"
U7: "42V, 0.5A Step-Down Switching Regulator"
U9: library part LP2992AIM5-5.0, "Micropower 250 mA Low-Noise Ultra Low-Dropout Regulator in SOT-23 and LLP Packages"
X1: library part Oscillator, "Oscillator"
X2 X3: library part 1WAY_TERMINAL

## Free pads (board coordinates)
  round 0 hole 86.61: 0(1320.87,905.51) 0(1320.87,2480.32) 0(4903.54,905.51) 0(4903.54,2480.32)

## Via types
v1: diameter 26, hole 13, Top Layer to Bottom Layer, 148 vias
v2: diameter 26, hole 13, Top Layer to Bottom Layer, tented both sides, 113 vias
v3: diameter 40, hole 20, Top Layer to Bottom Layer, 36 vias
v4: diameter 26, hole 13, Top Layer to Bottom Layer, tented bottom, 23 vias
v5: diameter 40, hole 20, Top Layer to Bottom Layer, tented both sides, 18 vias
v6: diameter 25.98, hole 12.99, Top Layer to Bottom Layer, tented top, 16 vias
v7: diameter 40, hole 20, Top Layer to Bottom Layer, tented top, 13 vias
v8: diameter 32, hole 16, Top Layer to Bottom Layer, tented both sides, 9 vias
v9: diameter 24, hole 13, Top Layer to Bottom Layer, 8 vias
v10: diameter 26, hole 13, Top Layer to Bottom Layer, tented top, 5 vias
v11: diameter 50, hole 25, Top Layer to Bottom Layer, tented both sides, 2 vias
v12: diameter 23.62, hole 11.81, Top Layer to Bottom Layer, tented both sides, 1 vias

## Nets (pads, with @x,y where several pads share a name; then routed paths per layer and width w, separated by ;. In a path a pad name is that pad's centre, name@x,y a point inside that pad or via, vN(x,y) a via of type N, cw(c..) or ccw(c..) an arc to the next point about the centre after c; other vN are vias at no path point)
3V3: C1.1 C7.2 C8.2 C46.2 C49.2 C50.2 D11.2 D12.2 D13.2 D14.2 D15.1 F5.1 P1.2 P5.1 P9.2 P10.1 R1.1 R2.1 R3.2 R6.2 R7.2 R8.2 R9.2 R13.2 R34.2 U4.10 U6.8 U8.24 U9.5 X1.1 X1.4 | length 7809.2
  Top Layer w14: U6.8@4540.83,645 4550.47,645 R3.2@4620.47,575 ; U4.10@4643.11,1134.41 C7.2@4703.15,1134.41 ; C8.2@4679.09,891.54 C8.2@4685,897.44 ; v4(4865,575) R2.1@4865.47,575
  Top Layer w16: R9.2@4785,1325.47 4810.47,1325.47 v2(4830,1345)
  Top Layer w24: D15.1@3200,2438.46 3208.46,2430 3245,2430 3260,2415 3430,2415 3466,2451 3534,2451 3565,2420 3675,2420 ; v8@3675,2385 3675,2420 ; D14.2@4155.47,2509.06 4155.47,2450 ; R13.2@4280.47,1125 4280,1125.47 F5.1@4230,1125.47 4229.27,1125.47 4192.28,1162.46 4192.28,1282.28 4235,1325 4254.19,1325 4317.56,1388.37 C46.2@4317.56,1395 4352.4,1429.84 U9.5@4352.4,1462.76 ; D13.2@4315.47,2509.06 4315.47,2450 ; C1.1@4465,852.56 4529.53,852.56 X1.4@4568.5,891.54 ; 4475.47,2450 D12.2@4475.47,2509.06 ; X1.4@4571.54,891.54 X1.1@4631.5,891.54 C8.2@4679.09,891.54 ; v2(4580,575) R3.2@4620.47,575 ; D11.2@4635.47,2509.06 4635.47,2440.47 ; R34.2@4679.13,2234.25 4679.13,2249.13 4717.56,2287.56 C49.2@4730,2287.56 4772.56,2287.56 v2(4775,2290) v2(4775,2325) 4785,2335 4785,2379.94 4724.47,2440.47 4635.47,2440.47 ; v2(4685,860) C8.2@4685,897.44 ; R8.2@4785,1210 R8.2@4785,1210.47 4795.47,1200 P9.2@4875,1200 ; 3675,2420 3790,2420 3830,2380 v8(3930,2380) 3935.79,2385.79 4005.79,2385.79 4070,2450 4155.47,2450 ; 4155.47,2450 4315.47,2450 ; 4315.47,2450 4365,2450 4374.53,2440.47 4635.47,2440.47
  Top Layer w30: U9.5@4355,1460 4387.24,1460 4447.24,1520 4540,1520 4565,1495 4754.5,1495 4822.47,1562.97 4822.47,1622.47 4875,1675 v2(4875,1685) v2(4875,1725)
  Top Layer w32: v2(4775,2170) 4775,2120 P1.2@4835,2060
  Bottom Layer w16: R6.2@3675,2349.53 v8@3675,2375 ; v8@3932.8,2382.01 3940,2374.8 R7.2@3940,2350 ; C50.2@4235,2212.44 4236.81,2210.63 4275,2210.63 ; v2(4275,2450) 4274,2451 4231,2451 4231,2322.99 4247.99,2306 4252.65,2306 4275,2283.65 4275,2210.63 ; U8.24@4307.09,2210.63 4275,2210.63 ; v2(4830,1345) 4855.61,1345 ; 4856.14,1345.53 4928,1345.53
  Bottom Layer w24: P5.1@3950,565 3979.96,565 4029.49,614.53 4070.51,614.53 4120.04,565 4304.96,565 4354.49,614.53 4440.47,614.53 4480,575 v2(4580,575) v4(4865,575) v4(4865,764.53) 4785,844.53 4785,910 ; v2(4685,860) 4685,880 4715,910 4785,910 ; v2(4775,2135) v2(4775,2325) ; P9.2@4875,1200 4795,1200 v2(4715,1120) 4715,1075 4750,1040 4800,1040 4823,1017 4823,983 4785,945 4785,910
  Bottom Layer w32: P1.2@4835,2060 4835,1995 4900,1930 4900,1750 v2(4875,1725) v2(4875,1685) ; P9.2@4875,1200 4875,1224.3 4928.53,1277.83 4928.53,1625 v2@4875,1678.53
  other v2: 4230,2450
  other v8: 3675,2380
5V: C42.2 C45.2 C48.2 C53.1 D19.1 F4.2 L4.2 LS1.1 P9.6 R31.2 R32.2 U9.1 U9.3 | length 5062.3
  Top Layer w16: v8(3505,2395) 3505,2311.07 3565.02,2251.05 3593.95,2251.05 v4(3645,2200) ; v2@4215.47,2164.53 R32.2@4215.47,2235
  Top Layer w24: C42.2@4182.44,1905 4170,1917.44 4170,2080 4220,2130 v2(4220,2160) ; U9.3@4277.6,1557.24 4277.6,1512.4 4280,1510 4350,1510 4352.4,1512.4 U9.1@4352.4,1557.24 4367.56,1572.4 C48.2@4367.56,1640 ; L4.2@4444.02,1670 4584.02,1530 4740,1530 4787.47,1577.47 4787.47,1636.97 4830,1679.5 v2(4830,1725)
  Mid-Layer 1 w16: v8(3500,2565) v8@3500,2574.97
  Mid-Layer 1 w20: v2(2060,2350) 2063,2353 2063,2417.6 2220.37,2574.97 3500,2574.97 4025.03,2574.97 v2(4100,2500)
  Bottom Layer w16: F4.2@2015,2339.53 2018.28,2342.81 v2@2052.81,2342.81 ; v8(3505,2395) v8@3505,2562.01 ; D19.1@3591.26,2195 3640,2195 v4(3645,2200) 3650,2195 C53.1@3650,2132.56
  Bottom Layer w24: v2(4100,2500) 4180,2420 4180,2180 4200,2160 v2@4215,2160 ; v2(4830,1725) 4830,1645 P9.6@4875,1600
  Bottom Layer w30: v2(4170,2010) 4170,1830.91 4149.47,1810.38 4149.47,1780.56 4215.03,1715 v2(4400,1715)
  other v2: 4830,1685 4170,1970
  other v4: 4365,1715
24V: C14.2 C15.2 C16.2 C17.2 C18.2 C19.2 D2.4 P2.5 P3.5 P4.5 P6.2 R15.2 | length 2919.7
  Bottom Layer w23.62: 1760,1180 1640,1300 1640,1660 1795,1815 R15.2@1845.47,1815 ; 1762.96,1177.04 1865,1075
  Bottom Layer w100: v1(2355,1180) 2555,1180
  Bottom Layer w120: P6.2@1450,1136.1 1546.1,1136.1 1587.04,1177.04 1762.96,1177.04 ; P3.5@2435,810 2435,827.38 2434.41,827.97 2470,863.56 2470,1075
  Bottom Layer w150: P2.5@1677.8,827.2 1677.8,872.57 1880,1074.77 ; 2555,1180 2925,1180 3190,915 P4.5@3190,825
  other v1: 1995,1090 2040,1090 2085,1090 2205,1130 2255,1130 2305,1130 2355,1130 2205,1180 2255,1180 2305,1180 2205,1230 2255,1230 2305,1230 2355,1230 2685,1260 2205,1280 2255,1280 2305,1280 2355,1280 2685,1310 2205,1330 2255,1330 2305,1330 2355,1330 2685,1360
AGND: C2.2 C3.2 C4.1 C5.1 C9.1 C43.1 F6.2 R5.1 R30.1 U3.5 U4.24 | length 4277.9
  Top Layer w14: v4(4280.47,1068.03) C43.1@4282.44,1070 ; F6.2@4289.53,1255 4290,1255 4337.56,1207.44 C9.1@4337.56,1200 ; C9.1@4337.56,1212.44 C9.1@4337.56,1200 ; U4.24@4406.89,1185.59 4351.97,1185.59 C9.1@4337.56,1200
  Top Layer w20: R30.1@4280.47,1015 4280.47,1045 ; v4(4280.47,1068.03) 4280.47,1045 ; C4.1@4282.44,900 4249.19,933.25 4249.19,954.51 4214,989.7 4214,1029 4230,1045 4280.47,1045
  Mid-Layer 1 w20: v2(2060,2270) v2(2060,2310) 2065,2310 2091,2336 2091,2406 2231.97,2546.97 3469.94,2546.97 3485.92,2531 3514.08,2531 3530.06,2546.97 3833.03,2546.97 3983.08,2396.92 4026.92,2396.92 4295,2128.84 4295,1251.16 4337.56,1208.6 v4(4337.56,1197.56)
  Bottom Layer w14: v4(4280.47,1068.03) 4280.47,1140.47 v4(4337.56,1197.56)
  Bottom Layer w19.68: C3.2@1957.56,2230 C3.2@1955,2227.44 2017.99,2227.44 v2@2060,2269.45
BUS_1: D3.2 R3.1 U4.11 U6.1 | length 924.9
  Top Layer w10: U4.11@4643.11,1160 4644.42,1161.31 4733.37,1161.31 4746.99,1147.69 4747.31,1147.69 4781,1114 4781,1082.3 4726.3,1027.6 4726.3,836.75 4705,815.46 4705,611.55 4710.54,606.01
  Top Layer w16: R3.1@4679.53,575 4710.54,606.01 4749.53,645 U6.1@4769.17,645 4861.54,645 D3.2@4871.54,635
BUS_2: D1.2 U4.13 U6.4 | length 689
  Top Layer w10: U4.13@4643.11,1211.18 4734.73,1211.18 4754.28,1191.63 4754.28,1191.31 4761.9,1183.69 4762.22,1183.69 4817,1128.91 4817,1067.39 4762.3,1012.68 U6.4@4762.3,801.88
  Top Layer w16: U6.4@4785,795 4781.35,795 4871.35,705 D1.2@4871.54,705
BUS_EN: U4.12 U6.2 U6.3 | length 661.6
  Top Layer w10: U4.12@4643.11,1185.59 4734.87,1185.59 4736.28,1184.17 4736.28,1183.85 4754.44,1165.69 4754.76,1165.69 4799,1121.46 4799,1074.84 4744.3,1020.14 4744.3,1000 4744.3,829.3 4724.68,809.68 4724.68,783.91 4763.58,745 U6.3@4769.17,745
  Top Layer w16: U6.2@4769.17,695 U6.3@4769.17,745
DGND: C1.2 C6.1 C7.1 C8.1 C38.1 C40.1 C41.1 C45.1 C46.1 C47.1 C48.1 C49.1 C50.1 C53.2 C55.1 D8.1 D9.2 D10.2 D17.1 F1.2 F6.1 P1.3 P5.4 P9.1 P10.4 Q3.2 Q4.2 R10.1 R28.1 R33.1 SW1.1 SW1.2 SW2.3 SW2.4 SW3.3 SW3.4 U4.5 U4.16 U4.29 U6.5 U7.4 U8.1 U9.2 X1.2
  other v2: 4435,570 4500,610 4820,710 4950,810 4040,840 4180,995 4540,1000 4870,1010 4950,1010 4180,1030 4230,1085 4755,1100 4230,1220 4260,1290 4650,1345 4200,1350 4660,1455 4425,1565 4625,1575 4725,1575 4260,1635 4830,1770 4335,1775 4520,1800 4600,1850 4435,2015 4500,2105 4640,2105 4640,2190 4145,2215 4364.53,2275 4640,2275 3200,2285 3270,2285 4815,2315 4895,2325 4095,2380 4950,2380 3895,2415 4795,2560
  other v4: 4690,952.56
  other v6: 4454.13,1089.13 4501.38,1089.13 4548.62,1089.13 4595.87,1089.13 4454.13,1136.38 4501.38,1136.38 4548.62,1136.38 4595.87,1136.38 4454.13,1183.62 4501.38,1183.62 4548.62,1183.62 4595.87,1183.62 4454.13,1230.87 4501.38,1230.87 4548.62,1230.87 4595.87,1230.87
  other v8: 3835,2295 3890,2295 3445,2325 3080,2350 3080,2440
GND: C14.1 C15.1 C16.1 C17.1 C18.1 C19.1 C20.1 C21.1 C22.1 C23.1 C24.1 C25.1 C26.1 C27.2 C28.1 C29.1 C30.1 C31.1 C33.2 C34.1 C35.1 C36.1 C51.1 C52.1 C54.1 D4.1 D6.1 F1.1 L12.1 P2.2 P2.3 P3.2 P3.3 P4.2 P4.3 P6.1 P7.1 P8.1 R16.1 R17.1 R19.1 R21.1 R22.1 R24.1 R25.1 R36.1 U1.5 U1.11 U2.6 U2.9 U5.6 U5.9 X3.1 | length 82.4
  Top Layer w24: C35.1@3083.83,1853.84 U5.6@3083.83,1936.29
  other v1: 2130,905 2225,905 2320,905 2385,905 2685,920 3345,955 4015,955 2685,970 3300,995 3345,995 3970,995 4015,995 2685,1020 1710,1050 1710,1090 1750,1090 1800,1770 1850,1770 1905,1770 1955,1770 1850,1865 2195,1865 2235,1865 2275,1865 2020,1950 2070,1950 2020,1995 2070,1995 3035,2025 3175,2025 3870,2025 4015,2025 3035,2065 3180,2065 3870,2065 4020,2065 1775,2335
  other v2: 3835,915 3875,1850 3040,1860 1800,1865
  other v3: 1900,930 2060,930
  other v4: 3081.85,1775 3856.85,1775
  other v5: 1490,560 3790,565 3790,635 1285,790 1375,790 2590,925 2785,925 1285,1015 2800,1330 1315,1865 1315,1935 1310,2185 1310,2250 1465,2555 1535,2555 1935,2555 2000,2555
  other v7: 1800,1610 1875,1610 1950,1610 2025,1610 2100,1610
  other v9: 3920,2025 3970,2025 3083.83,2026.29 3133.83,2026.29 3920,2065 3970,2065 3083.83,2066.29 3133.83,2066.29
M\C\L\R\: P1.1 R13.1 U4.26 | length 1823.7
  Top Layer w12: v2(4790,1000) 4835,1045 4915,1045 4935,1065 P1.1@4935,2010
  Top Layer w14: v4(4339.53,1125) 4348.94,1134.41 U4.26@4406.89,1134.41
  Bottom Layer w12: v4(4339.53,1125) 4339.53,1010.47 4383,967 4557,967 4583,993 4583,1011.18 4598.82,1027 4621.18,1027 4633.18,1015 4666.82,1015 4673.82,1022 4698,1022 4720,1000 v2(4790,1000)
NetC2_1: C2.1 C3.1 F4.1 U3.8 | length 362.6
  Bottom Layer w10: U3.8@1665,2230.83 1665,2236.42 1703.91,2275.32 1770.32,2275.32 1777.56,2282.56 C2.1@1885,2282.56 C3.1@1955,2282.56 ; C3.1@1962.56,2280 F4.1@2010.47,2280
NetC4_2: C4.2 R4.1 R5.2 U4.28 | length 3982
  Top Layer w12: C4.2@4337.56,900 4337.56,906.74 4367.31,936.48 4367.31,1022.31 v2@4387.5,1042.5 ; v2(4387.14,1042.86) 4387.14,1063.48 U4.28@4406.89,1083.23
  Mid-Layer 2 w20: v2(1755,2055) 1755,1652.53 1712,1609.53 1712,1318 1803,1227 1995.47,1227 2160.47,1062 3743,1062 3903,902 4246.28,902 v2(4387.14,1042.86)
  Bottom Layer w12: R4.1@1705,2102.44 R5.2@1765,2102.44 ; v2(1755,2055) 1755,2090.47 R5.2@1765,2100.47
NetC5_2: C5.2 U3.6 | length 115.5
  Bottom Layer w10: U3.6@1765,2230.83 1765,2225.24 1803.93,2186.31 1818.1,2186.31 C5.2@1846.85,2157.56
NetC6_2: C6.2 U4.17 | length 67.7
  Top Layer w14: U4.17@4550.59,1278.11 4550.59,1343.15 C6.2@4552.44,1345
NetC9_2: C9.2 F5.2 U4.25 | length 199.9
  Top Layer w14: F5.2@4230,1184.53 4264.53,1184.53 4280,1200 C9.2@4282.44,1200 4322.44,1160 U4.25@4406.89,1160
NetC10_1: C10.1 C11.1 C12.1 C13.1 D2.1 D2.3 L12.2
  other v1: 1830,1395 1880,1395 1930,1395
  other v4: 2190,1480 2370,1480 2525,1480 2615,1480 2705,1480 2795,1480 2190,1515 2370,1515
  other v5: 2285,1500
  other v7: 2025,1350 2025,1425 2100,1425 1800,1500 1875,1500 1950,1500 2025,1500 2100,1500
NetC10_2: C10.2 C11.2 C12.2 C13.2 L1.2 Q5.4 Q11.4
  other v1: 2580,1565 2630,1565 2680,1565 2730,1565 2780,1565 2830,1565 2580,1615 2630,1615 2680,1615 2730,1615 2780,1615 2830,1615 2580,1665 2630,1665 2680,1665 2730,1665 2780,1665 2830,1665 2580,1715 2630,1715 2680,1715 2730,1715 2780,1715 2830,1715 2580,1765 2630,1765 2680,1765 2730,1765 2780,1765 2830,1765 2580,1815 2630,1815 2680,1815 2730,1815 2780,1815 2830,1815 2580,1865 2630,1865 2680,1865 2730,1865 2780,1865 2830,1865 2540,2075 2540,2120 2540,2165 2540,2210 2540,2255 2540,2300 2540,2345 2540,2390
  other v3: 2650,1940 2715,1940 2780,1940 2650,2005 2715,2005 2780,2005 2390,2055 2650,2070 2715,2070 2780,2070 2320,2125 2390,2125 2650,2135 2715,2135 2780,2135 2320,2195 2390,2195 2650,2200 2715,2200 2780,2200 2320,2265 2390,2265 2650,2265 2715,2265 2780,2265 2320,2335 2390,2335 2650,2335 2715,2335 2320,2405 2390,2405
NetC22_2: C22.2 R14.1 U1.6 | length 104.4
  Bottom Layer w10: U1.6@2129.65,2009.37 2127.56,2011.46 C22.2@2127.56,2060 R14.1@2180.47,2060
NetC23_2: C23.2 U1.8 | length 106.7
  Bottom Layer w10: U1.8@2129.65,1970 2130.43,1969.22 2181.21,1969.22 C23.2@2220,1930.43
NetC24_2: C24.2 R18.2 U1.1 | length 118.3
  Bottom Layer w10: U1.1@1960.35,1930.63 1964.88,1926.1 C24.2@1964.88,1870 1964.88,1816.97 R18.2@1962.91,1815
NetC25_2: C25.2 U1.3 | length 105.6
  Bottom Layer w10: C25.2@1860,1982.56 1902.44,1982.56 1915,1970 U1.3@1960.35,1970
NetC26_2: C26.2 R18.1 | length 48
  Bottom Layer w10: R18.1@2021.97,1815 C26.2@2070,1815